# Altium PCB PCB1.PcbDoc (part 3 of 3)
Units mm, origin at the board's own origin, x right, y up, seen from the top; angles counter-clockwise.
Board outline 52.5 x 44.25 mm, 6 copper layers (Top Layer, Int1 (GND), Int2 (Sign), Int3 (Sign), Int4 (PWR), Bottom Layer), stack 1.551 mm thick; 69 components, 80 nets, 350 pads, 96 vias.
Unrouted connection lines stored in the file: 150.
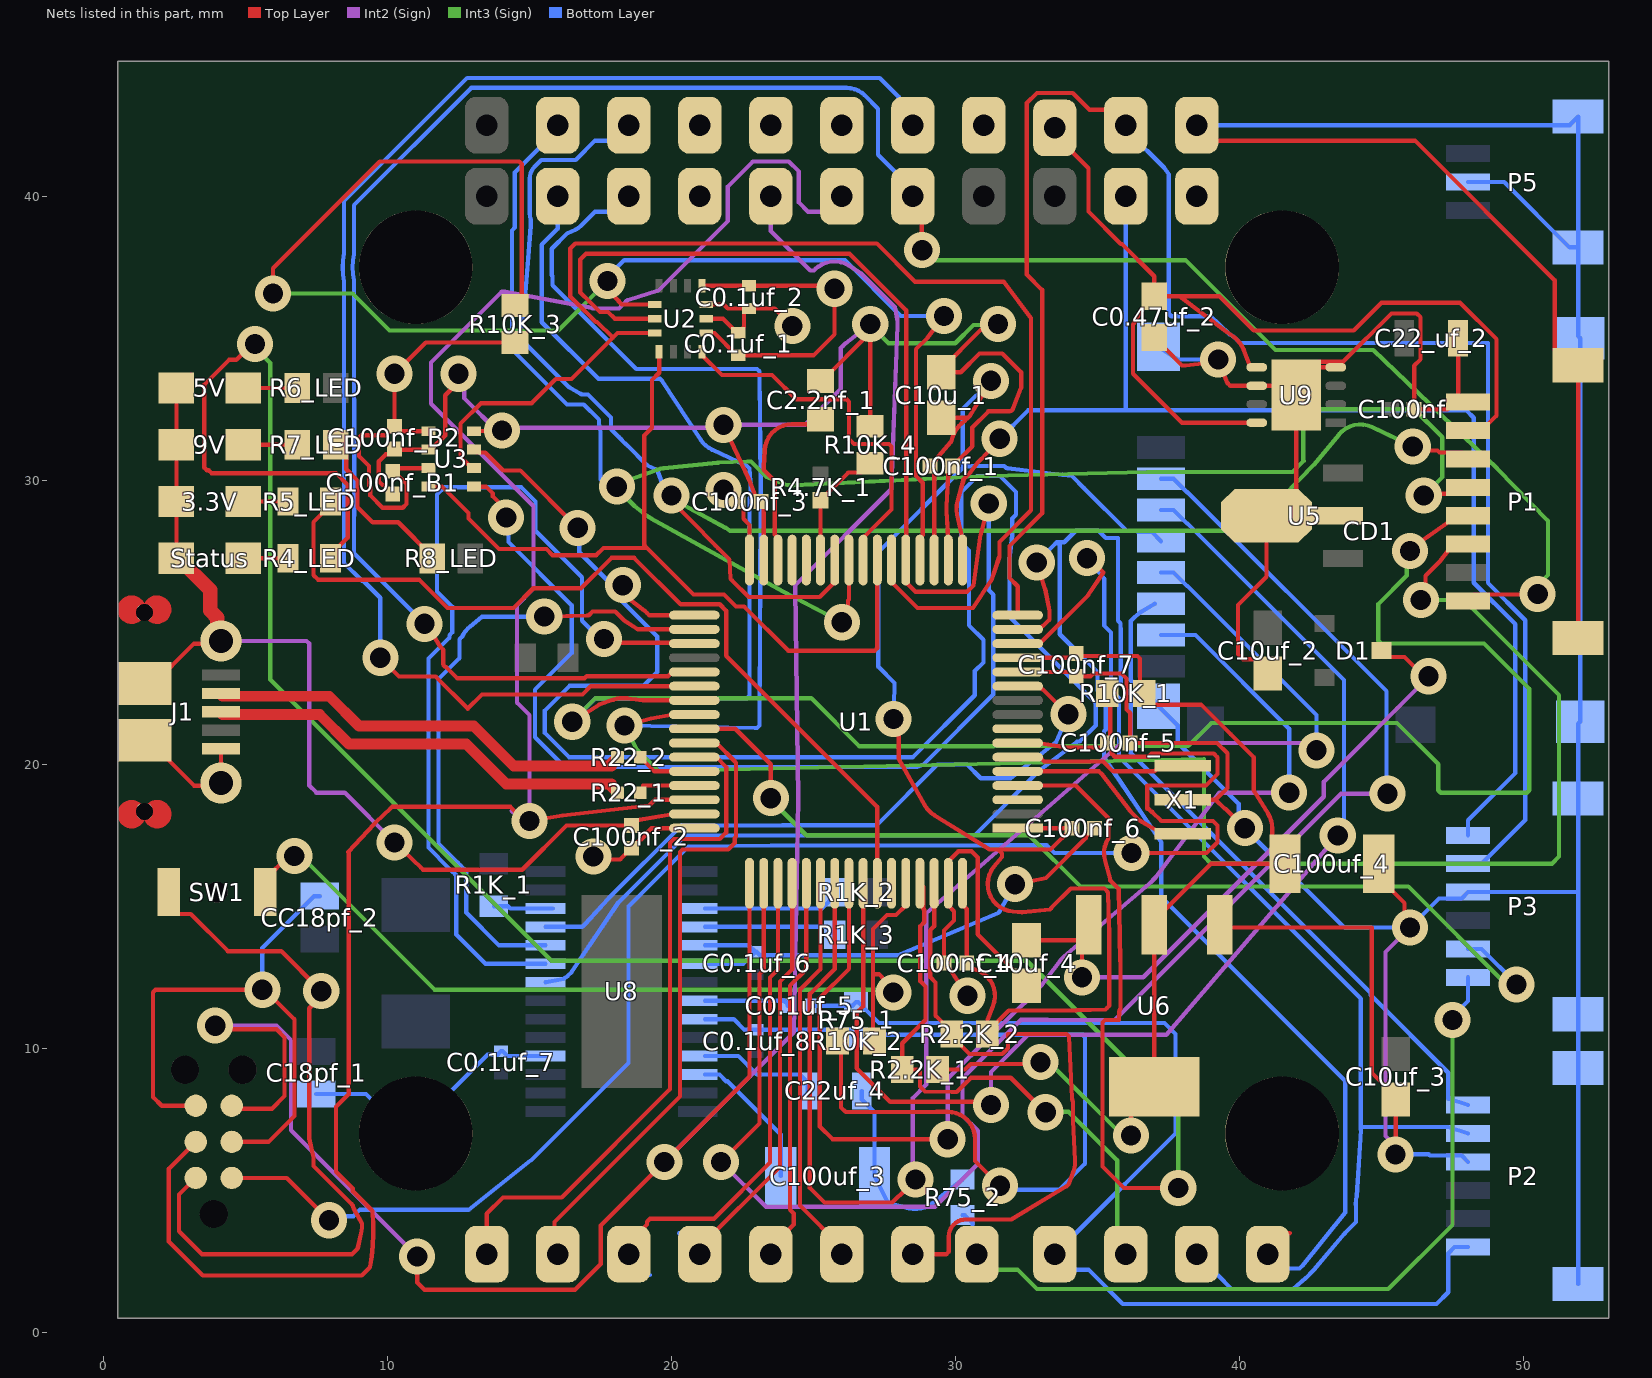
[diagram p6: the nets of this part, all layers, seen from the top]

## Via types
v1: diameter 1.27, hole 0.711, Top Layer to Bottom Layer, 96 vias

## Nets (pads, with @x,y where several pads share a name; then routed paths per layer and width w, separated by ;. In a path a pad name is that pad's centre, name@x,y a point inside that pad or via, vN(x,y) a via of type N, cw(c..) or ccw(c..) an arc to the next point about the centre after c; other vN are vias at no path point) (continued)
FLASH_CS: CD1.2 U1.50 | length 57.8
  Top Layer w0.15: v1(21.75,6) 23.1,7.35 23.1,12.616 23.25,12.766 U1.50@23.25,15.809
  Int2 (Sign) w0.15: v1(21.75,6) 23.33,4.42 29.277,4.42 30.787,5.93 30.787,7.1 30.252,7.635 30.252,8.947 32.311,11.006 33.248,11.006 33.254,11 35.608,11 43.573,18.964 v1(45.215,18.964)
  Bottom Layer w0.15: CD1.2@37.24,30.05 37.68,30.05 38.155,29.575 38.173,29.575 45.174,22.574 45.174,19.005 v1(45.215,18.964)
GND: 3.3V.1 5V.1 9V.1 C0.1uf_1.2 C0.1uf_2.2 C0.1uf_6.2 C0.1uf_7.2 C0.1uf_8.2 C0.47uf_2.2 C2.2nf_1.1 C10u_1.2 C10uf_2.2 C10uf_3.2 C10uf_4.2 C18pf_1.2 C22_uf_2.2 C100nf.2 C100nf_1.2 C100nf_2.2 C100nf_3.2 C100nf_4.2 C100nf_5.2 C100nf_6.2 C100nf_7.2 C100nf_B1.2 C100nf_B2.2 C100uf_4.2 CC18pf_2.2 CD1.6 CD1.11 CD1.12 CD1.13 CD1.14 J1.5 J1.6 J1.7 J1.8 J1.9 J1.10 J1.11 P1.8 P1.MP1 P1.MP2 P2.3 P2.MP1 P2.MP2 P3.3 P3.MP1 P3.MP2 P5.2 P5.MP1 P5.MP2 pad.5 pad.8 pad.11 pad.14 pad.44 pad.55 pad.56 pad.57 pad.59 pad.60 pad.63 pad.64 R10K_2.1 R10K_4.1 R75_1.1 Status.1 U1.12 U1.18 U1.31 U1.47 U1.63 U2.6 U2.7 U3.1 U3.7 U5.2 U6.1 U8.4 U8.19 U8.20 U8.23@20.93,11.025 U9.4 U9.6 U9.9 X1.2 | length 388.8
  Top Layer w0.15: J1.9@1.491,22.747 1.691,22.747 3.191,24.247 J1.6@4.191,24.247 ; J1.10@1.591,20.747 1.891,20.447 1.991,20.447 3.191,19.247 J1.7@4.144,19.247 ; Status.1@2.575,27.25 3.3V.1@2.575,29.25 9V.1@2.575,31.25 5V.1@2.575,33.25 2.605,33.25 5V.1@3.08,33.725 ; pad.64@3.251,7.976 2.055,7.976 1.75,8.28 1.75,11.974 1.838,12.062 v1(5.596,12.062) ; J1.7@4.144,19.344 J1.5@4.144,20.544 ; pad.63@4.521,6.706 5.817,6.706 6.731,7.62 6.731,11.019 v1@5.642,12.108 ; C100nf_B1.2@10.185,29.515 9.87,29.83 9.832,29.83 9.7,29.962 9.7,30.668 9.947,30.915 10.065,30.915 C100nf_B2.2@10.25,31.1 10.275,31.075 U3.7@11.45,31.075 11.525,31.075 11.775,31.325 11.793,31.325 12.039,31.571 12.039,32.994 12.5,33.455 v1(12.5,33.75) ; v1(10.25,17.25) 11.195,16.349 11.258,16.286 13.8,16.286 14.75,16.286 16.307,17.843 C100nf_2.2@18.592,17.843 18.777,18.028 20.071,18.25 U1.47@20.809,18.25 ; U3.1@13.05,31.725 13.062,31.737 14.024,31.737 v1(14.036,31.749) ; pad.14@21,42.5 pad.14@21,42.738 ; U2.6@21.233,35.687 21.813,35.687 22.302,35.198 C0.1uf_1.2@22.352,35.198 22.402,35.198 22.527,35.323 22.527,35.373 22.558,35.404 22.558,35.924 C0.1uf_2.2@22.683,36.049 ; U2.7@21.233,36.187 21.843,36.187 21.981,36.049 C0.1uf_2.2@22.683,36.049 ; v1(21.837,31.951) 22.71,30.067 cw(c21.835,29.662) 22.729,30.022 22.965,29.435 23.25,29.15 U1.31@23.25,27.191 ; v1(24.257,35.433) 23.641,36.049 C0.1uf_2.2@22.733,36.049 C0.1uf_2.2@22.683,36.049 ; C2.2nf_1.1@25.25,33.5 25.3,33.5 v1@27,35.2 ; R10K_2.1@25.85,10.25 25.974,10.126 25.974,7.917 26.137,7.754 29.32,7.754 29.33,7.764 29.729,7.764 cw(c29.729,6.8) 30.693,6.795 30.692,6.603 30.692,6.033 v1(31.564,5.162) ; v1@26.83,35.5 v1(27,35.5) v1@27,35.2 ; R10K_4.1@27,31.9 v1@27,35.2 ; U1.18@29.75,27.191 29.75,27.929 29.689,28.919 cw(c31,29) 29.688,29.071 29.75,30.226 29.75,30.35 C100nf_1.2@29.9,30.5 30.594,31.193 30.594,31.861 31.158,32.426 31.888,32.426 ; v1(30.427,11.851) 29.785,12.815 C100nf_4.2@29.6,13 29.6,14.15 29.95,14.5 29.95,14.827 29.75,15.027 U1.63@29.75,15.809 29.75,16.586 30.102,16.938 30.562,16.938 30.617,16.883 30.785,16.715 30.785,14.012 32.5,12.296 C10uf_4.2@32.5,12.198 ; v1(31.5,35.5) 31.286,35.286 30.886,35.286 29.5,33.9 C10u_1.2@29.5,33.802 30.189,33.802 30.851,34.464 31.649,34.464 32.313,33.8 32.313,33.254 32.028,32.521 cw(c31.888,32.576) 31.889,32.426 ; v1(32.099,15.777) 33.034,15.957 33.185,15.997 34.585,17.397 34.585,17.435 C100nf_6.2@34.9,17.75 ; U1.12@32.191,23.25 34.1,23.25 C100nf_7.2@34.25,23.1 34.757,23.1 34.857,23.2 35.843,23.2 36.025,23.018 36.025,21.932 36.157,21.8 36.157,20.757 C100nf_5.2@36.15,20.75 ; C100nf_5.2@36.269,20.75 39.213,20.75 39.575,20.388 39.575,19.163 39.162,18.75 ; C0.47uf_2.2@37,35.023 37,35 37.381,34.619 37.404,34.619 37.979,34.044 38.104,34.044 39.162,34.162 v1(39.25,34.25) 39.587,33.413 39.651,33.349 39.675,33.325 U9.6@40.61,33.325 41.675,33.325 U9.9@42,33 ; X1.2@38,18.75 39.162,18.75 ; pad.5@38.5,42.5 39.044,41.956 46.182,41.956 51.1,37.038 51.1,34.575 51.625,34.05 P1.MP2@51.925,34.05 P1.MP1@51.925,24.45 ; U6.1@39.3,14.35 39.3,13.875 39.537,14.112 39.675,14.25 44.662,14.25 44.662,9.134 45.5,8.296 C10uf_3.2@45.5,8.198 ; v1(40.189,17.75) 39.5,18.439 39.473,18.439 39.162,18.75 ; C10uf_2.2@41,23.198 41,23.269 40.569,23.7 40.126,23.7 39.95,23.876 39.95,25.605 40.95,26.605 U5.2@40.95,28.75 U5.2@41.125,28.75 ; U9.9@42.459,33.209 U9.9@42.613,33.363 ; U9.4@43.391,33.975 42.8,33.975 U9.9@42,33.175 ; U5.2@43.45,28.75 U5.2@41.125,28.75 ; C100uf_4.2@44.9,16.5 44.9,16.025 45.815,15.11 45.815,14.435 v1(46,14.25) ; v1(45.498,6.266) 45.498,8.196 C10uf_3.2@45.5,8.198 ; C10uf_3.2@45.75,7.948 C10uf_3.2@45.5,8.198 ; C22_uf_2.2@47.7,35 47.7,32.975 47.925,32.75 47.575,32.75 47.325,32.5 C100nf.2@46.15,32.5 46.15,34.032 46.375,34.257 46.375,35.743 46.243,35.875 45.357,35.875 43.657,34.175 42.8,34.175 42,33.375 U9.9@42,33.175 ; U5.2@41.125,28.75 42,29.625 U9.9@42,33 ; U9.9@42,33 U9.9@42,33.175
  Top Layer w0.5: Status.1@2.575,27.25 2.65,27.25 3.76,26.14 3.76,25.411 4.009,25.162 4.009,24.429 J1.6@4.191,24.247
  Int2 (Sign) w0.15: J1.6@4.144,24.344 7.156,24.344 7.25,24.25 7.25,19.25 7.499,19.001 8.499,19.001 v1(10.25,17.25) ; v1(12.5,33.75) 12.703,33.547 12.703,32.89 13.94,31.653 14.137,31.85 21.744,31.85 v1@21.844,31.75 ; v1(21.837,31.951) 21.837,31.757 v1@21.844,31.75 ; v1(27,35.5) 26.14,34.828 26.052,34.74 25.964,34.652 25.964,33.214 24.701,31.951 22.045,31.951 v1@21.844,31.75 ; v1(45.498,6.266) 45.498,6.555 45.14,6.914 45.14,13.39 v1(46,14.25)
  Int3 (Sign) w0.15: v1(27,35.5) 27,35.466 27.644,34.822 29.994,34.822 30.64,35.468 31.468,35.468 v1(31.5,35.5)
  Bottom Layer w0.15: v1@5.381,12.276 v1(5.596,12.062) 5.596,13.531 7.42,15.355 CC18pf_2.2@7.62,15.355 ; C18pf_1.2@7.493,8.394 9.247,8.394 10.641,7 pad.56@11,7 11,7.25 13.525,9.775 13.875,9.775 C0.1uf_7.2@14,9.9 14.05,9.9 14.225,9.725 U8.4@15.57,9.725 ; U8.23@21.18,11.025 22.199,11.025 22.574,10.65 C0.1uf_8.2@23,10.65 26.225,10.65 R75_1.1@26.5,10.375 26.6,10.475 34.477,10.475 34.565,10.387 34.565,5.939 33.642,5.016 31.71,5.016 v1(31.564,5.162) ; U8.20@21.18,12.975 22.525,12.975 C0.1uf_6.2@22.95,13.4 ; U8.19@21.18,13.625 22.725,13.625 C0.1uf_6.2@22.95,13.4 ; v1(32.099,15.777) 31.553,14.818 31.543,14.801 31.528,14.787 31.507,14.766 27.965,13.275 23.263,13.275 23.125,13.275 C0.1uf_6.2@23,13.4 C0.1uf_6.2@22.95,13.4 ; CD1.13@37,35.475 CD1.13@37.15,34.7 37.825,34.25 v1(39.25,34.25) ; CD1.6@37.02,25.65 36.475,25.325 36.307,25.175 36.175,25.043 36.175,22.957 36.307,22.825 36.475,22.765 CD1.14@37.15,22.09 ; CD1.14@37.15,22.04 37.825,21.365 37.825,20.757 39.975,18.607 39.975,17.964 v1(40.189,17.75) 43.689,14.25 v1(46,14.25) 47.025,15.275 47.825,15.275 P3.3@48.05,15.5 51.925,15.5 ; pad.5@38.5,42.857 pad.5@38.5,42.5 51.625,42.5 P5.MP1@51.925,42.8 P5.MP2@51.925,38.2 ; v1(45.498,6.266) 46.662,6.266 46.703,6.225 47.825,6.225 P2.3@48.05,6 ; P5.2@48.05,40.5 49.325,40.5 51.625,38.2 P5.MP2@51.925,38.2 ; P2.MP2@51.925,1.7 P2.MP1@51.925,9.3 P3.MP2@51.925,11.2 51.925,15.5 ; 51.925,15.5 P3.MP1@51.925,18.8 51.925,21.425 CD1.11@52,21.5 CD1.12@52,35 51.925,35.075 P5.MP2@51.925,38.2
GYRO_1_CS: R10K_3.2 U1.20 U2.12 | length 53.7
  Top Layer w0.15: v1(5.969,36.576) 5.969,37.465 9.729,41.225 14.644,41.225 14.732,41.137 14.732,36.382 R10K_3.2@14.5,36.15 ; v1(17.755,37.012) 17.755,36.708 18.147,36.317 18.147,36.293 18.253,36.187 U2.12@19.407,36.187 ; U1.20@28.75,27.191 28.75,27.973 28.85,28.073 28.85,29.912 28.615,30.147 28.615,34.615 29.029,35.029 v1(29.593,35.786)
  Int3 (Sign) w0.15: v1(5.969,36.576) 8.777,36.576 10.078,35.275 16.018,35.275 v1(17.755,37.012)
  Bottom Layer w0.15: v1(17.755,37.012) 17.755,37.166 18.339,37.75 26.113,37.75 28.077,35.786 v1(29.593,35.786)
GYRO_1_EXTI: U1.24 U2.4 | length 13.3
  Top Layer w0.15: U2.4@21.07,34.525 21.07,34.412 21.78,33.702 23.545,33.702 24.397,32.85 26.162,32.85 26.25,32.762 26.25,31.457 26.432,31.275 27.662,31.275 27.75,31.187 27.75,28.968 26.75,27.968 U1.24@26.75,27.191
I2C1_SCL_PIN: pad.41 R2.2K_1.1 U1.61 | length 20.2
  Top Layer w0.15: U1.61@28.75,15.809 28.75,15.69 28.869,15.69 28.869,14.913 28.9,14.882 28.9,14.44 28.765,14.305 28.765,12.36 28.95,12.175 28.95,11.005 28.125,10.18 R2.2K_1.1@28.125,9.25 28.662,9.25 28.75,9.162 28.75,8.655 28.907,8.498 28.928,8.477 29.876,8.464 ccw(c29.878,8.614) 29.878,8.464 30.046,8.464 30.546,8.964 31.947,8.964 33.163,7.749 v1(33.178,7.749)
  Int3 (Sign) w0.15: v1(33.178,7.749) 33.195,7.766 33.984,7.766 35.694,6.056 35.694,3.056 pad.41@36,2.75
I2C1_SDA_PIN: pad.37 R2.2K_2.1 U1.62 | length 22.8
  Top Layer w0.15: pad.37@28.5,2.75 29.675,2.75 29.719,2.794 29.763,2.838 29.763,3.369 cw(c30.369,3.369) 30.369,3.975 31.964,3.975 33.908,5.142 33.926,5.154 33.982,5.209 34.151,5.658 ccw(c33.25,6) 34.213,6.049 34.142,7.47 cw(c34.292,7.478) 34.142,7.478 34.142,8.087 ccw(c33.992,8.087) 34.134,8.135 34.112,8.201 cw(c34.254,8.249) 34.104,8.241 33.996,10.412 33.908,10.5 31.849,10.5 31.849,10 31.649,9.8 30.5,9.8 29.875,10.425 R2.2K_2.1@29.875,10.5 29.875,10.575 29.3,11.15 29.3,12.32 29.115,12.505 29.115,14.16 29.25,14.295 U1.62@29.25,15.809
LED0: R4_LED.2 U1.4 | length 86.1
  Top Layer w0.15: v1(5.334,34.798) 5.237,34.798 4.677,34.238 4.42,34.238 3.556,33.374 3.556,30.441 3.644,30.353 3.707,30.353 3.81,30.25 8.193,30.25 8.6,29.843 8.6,27.975 8,27.375 R4_LED.2@8,27.25 ; U1.4@32.191,19.25 34.238,19.25 35.39,18.098 35.39,17.975 35.385,17.397 ccw(c36.195,16.874) 35.263,16.627 35.454,15.909 35.469,15.894 35.75,15.613 35.802,13.1 ccw(c35.952,13.103) 35.803,13.082 35.812,13.02 cw(c35.664,12.999) 35.814,12.999 35.814,11.401 35.806,11.391 ccw(c35.921,11.295) 35.771,11.301 35.76,11 ; 35.76,11 35.263,11 35.175,10.912 35.175,5.842 35.937,5.08 v1(37.846,5.08)
  Int3 (Sign) w0.15: v1(5.334,34.798) 5.334,34.666 5.876,34.124 5.876,22.987 15.782,13.081 32.511,13.081 37.846,7.746 v1(37.846,5.08)
LED1: R5_LED.2 U1.58 | length 31.2
  Top Layer w0.15: R5_LED.2@8,29.25 8,29.125 7.4,28.525 7.4,26.657 7.557,26.5 11.119,26.5 12.119,25.5 14.438,25.5 15.136,26.198 16.819,26.198 17.889,27.268 18.688,27.268 20.325,25.631 21.705,25.631 21.928,25.408 21.928,23.822 27.25,18.5 U1.58@27.25,15.809
LED_STRIP: P3.5 U1.41 | length 35.6
  Top Layer w0.15: U1.41@20.809,21.25 22.25,21.25 23.5,20 23.5,18.808 v1(23.499,18.807)
  Int3 (Sign) w0.15: v1(23.499,18.807) 23.499,18.751 24.132,18.118 24.75,17.5 32.596,17.5 34.399,15.697 45.947,15.697 49.393,12.25 v1(49.75,12.25)
  Bottom Layer w0.15: P3.5@48.05,13.5 48.525,13.5 49.75,12.275 v1(49.75,12.25)
MAX7456_SPI_CS: U1.33 U3.2 U8.8 | length 79.1
  Top Layer w0.15: U3.2@13.05,31.075 13.15,30.975 13.446,30.975 14.077,30.344 14.681,30.344 v1(16.699,28.326) ; v1(18.288,26.304) 18.226,26.242 18.226,26.035 19.057,25.409 19.145,25.321 19.216,25.25 U1.33@20.809,25.25
  Bottom Layer w0.15: U8.8@15.57,12.325 16.195,12.44 16.363,12.56 16.495,12.692 18.138,15.136 20.495,17.493 23.992,17.493 23.994,17.495 30.667,17.495 32.966,19.795 34.243,20.759 34.283,20.798 34.374,20.798 34.938,21.362 34.938,22.161 31.904,25.195 31.904,25.307 31.9,27.098 cw(c32.864,27.099) 31.905,27.203 32.001,28.073 32.001,28.65 32.136,28.784 32.136,29.583 31.571,30.148 30.772,30.148 30.208,29.583 30.208,27.792 30.475,27.525 30.475,24.891 30.984,24.382 30.984,23.583 30.682,23.281 30.682,22.432 28.5,20.25 16.391,20.25 15.544,21.097 15.544,21.896 16.409,22.761 19.011,22.761 19.5,23.25 19.5,24.5 18.059,25.941 v1@18.059,26.035 ; v1(16.699,28.326) 16.755,28.271 16.755,27.466 18.059,26.162 v1@18.059,26.035 ; v1(18.288,26.304) 18.059,26.075 v1@18.059,26.035
MCU_BOOT0: R10K_2.2 SW1.1 U1.60 | length 32.2
  Top Layer w0.15: SW1.1@5.7,15.5 5.7,15.95 6.52,16.77 v1(6.723,16.77) ; R10K_2.2@27.15,10.25 27.1,10.3 27.1,12.61 ; v1(27.814,11.961) 27.4,12.522 27.312,12.61 27.1,12.61 ; U1.60@28.25,15.809 28.25,15.032 27.908,14.69 27.592,14.69 27.1,14.198 27.1,12.61
  Int3 (Sign) w0.15: v1(6.723,16.77) 6.954,16.77 11.658,12.065 27.71,12.065 v1(27.814,11.961)
MCU_CLOCK_IN: U1.5 X1.1 | length 6.7
  Top Layer w0.15: U1.5@32.191,19.75 35.058,19.75 35.145,19.662 36.15,18.355 36.181,18.324 36.486,18.019 37.075,17.675 37.081,17.674 37.105,17.65 37.26,17.65 X1.1@38,17.55
MCU_CLOCK_OUT: U1.6 X1.3 | length 6.1
  Top Layer w0.15: U1.6@32.191,20.25 32.968,20.25 33.118,20.1 35.203,20.1 35.552,19.75 37,19.75 37.2,19.95 X1.3@38,19.95
MCU_NRST: C100nf_5.1 pad.62 R10K_1.1 U1.7 | length 60.9
  Top Layer w0.15: pad.62@4.521,5.436 6.456,5.436 v1(7.946,3.946) ; U1.7@32.191,20.75 32.929,20.75 33.856,20.601 ccw(c34,21.5) 34.007,20.59 35.165,20.59 C100nf_5.1@35.35,20.75 ; R10K_1.1@35.35,22.5 35.45,22.4 35.45,20.75 C100nf_5.1@35.35,20.75 ; v1(36.195,16.874) 38.842,16.874 39.225,17.257 39.225,17.843 39.068,18 37.25,18 36.925,18.325 36.907,18.325 36.8,18.432 36.75,18.432 36.75,19.25 38.818,19.25 39.225,19.657 39.225,20.243 39.093,20.375 36.907,20.375 36.797,20.265 35.612,20.265 35.507,20.369 35.507,20.593 C100nf_5.1@35.35,20.75
  Bottom Layer w0.15: v1(7.946,3.946) 8.09,4.09 8.806,4.09 9.035,4.319 12.862,4.319 ; 12.863,4.319 15.045,6.049 ccw(c14.446,6.804) 15.128,6.123 18.488,9.485 18.488,14.991 20.604,17.107 23.508,17.143 cw(c23.51,16.993) 23.51,17.143 24.137,17.143 30.812,17.145 33.216,17.145 33.488,16.874 v1(36.195,16.874)
MCU_VCAP1: C2.2nf_1.2 U1.30 | length 6.6
  Top Layer w0.15: U1.30@23.75,27.191 23.75,27.973 23.635,28.088 23.635,29.984 23.247,30.372 23.247,30.434 23.247,30.454 23.254,30.482 23.284,31.061 cw(c24.247,31.01) 24.247,31.974 24.85,31.974 C2.2nf_1.2@25.25,32.15
Net3.3V_2: 3.3V.2 R5_LED.1 | length 1.6
  Top Layer w0.15: 3.3V.2@4.925,29.25 R5_LED.1@6.5,29.25
Net5V_2: 5V.2 R6_LED.1 | length 1.9
  Top Layer w0.15: 5V.2@4.925,33.25 R6_LED.1@6.825,33.25
Net9V_2: 9V.2 R7_LED.1 | length 1.9
  Top Layer w0.15: 9V.2@4.925,31.25 R7_LED.1@6.825,31.25
NetC0.1uf_5_2: C0.1uf_5.2 U8.22 | length 3
  Bottom Layer w0.15: U8.22@21.18,11.675 23.975,11.675 24.1,11.55 C0.1uf_5.2@24.1,11.5
NetC10uf_4_1: C10uf_4.1 D1.3 U6.3 | length 22.9
  Top Layer w0.15: C10uf_4.1@32.5,13.802 U6.3@34.5,13.802 ; v1(34.455,12.5) 34.455,13.757 U6.3@34.5,13.802 ; U6.3@34.7,14.35 34.5,14.15 U6.3@34.5,13.802 ; D1.3@45,24 45.225,23.775 45.813,23.775 46.49,23.098 v1(46.659,23.098)
  Int2 (Sign) w0.15: v1(34.455,12.5) 36.613,12.5 42.968,18.855 42.968,19.381 46.659,23.072 v1(46.659,23.098)
NetC22uf_4_1: C22uf_4.1 U8.25 | length 4.3
  Bottom Layer w0.15: U8.25@21.18,9.725 22.357,9.725 23.007,9.075 24.525,9.075 24.8,8.8 C22uf_4.1@24.8,8.5
NetC22uf_4_2: C22uf_4.2 C100uf_3.2 R75_2.2 | length 7.2
  Bottom Layer w0.15: C22uf_4.2@26.7,8.5 26.7,8.2 27.15,7.75 C100uf_3.2@27.15,5.5 27.625,4.55 28.354,4.367 ccw(c28.589,5.302) 29.181,4.541 29.9,5.1 R75_2.2@30.25,5.375
NetC100uf_3_1: C100uf_3.1 U8.26 | length 5
  Bottom Layer w0.15: U8.26@21.18,9.075 21.69,9.075 21.925,8.84 21.973,8.84 23.85,6.963 C100uf_3.1@23.85,5.5
NetR1K_1_2: R1K_1.2 U8.12 | length 2.1
  Bottom Layer w0.15: R1K_1.2@13.75,15 14.25,15 14.325,14.925 U8.12@15.82,14.925
NetR1K_2_2: R1K_2.2 U8.17 | length 4.9
  Bottom Layer w0.15: U8.17@21.18,14.925 25.3,14.925 25.75,15.375 R1K_2.2@25.75,15.5
NetR1K_3_2: R1K_3.2 U8.18 | length 4.7
  Bottom Layer w0.15: U8.18@21.18,14.275 25.475,14.275 R1K_3.2@25.75,14
NetR4_LED_1: R4_LED.1 Status.2 | length 1.6
  Top Layer w0.15: Status.2@4.925,27.25 R4_LED.1@6.5,27.25
NetR7_LED_2: R7_LED.2 R8_LED.1 | length 5.9
  Top Layer w0.15: R7_LED.2@8.175,31.25 8.55,30.875 8.55,30.388 8.95,29.988 8.95,29.05 9.481,28.519 10.381,28.519 11.575,27.325 R8_LED.1@11.575,27.25
PC14: U1.3
PINIO1_PIN: U1.8
S1: P1.6 pad.15 U1.26 | length 57.2
  Top Layer w0.15: v1(20.006,29.462) 20.004,29.462 19.911,29.369 21.536,27.714 21.623,27.627 22.045,27.205 22.08,26.529 22.121,26.488 22.723,25.885 25.221,25.885 25.75,26.414 U1.26@25.75,27.191 ; v1(46.102,31.19) 46.241,31.05 46.969,31.05 47.044,30.975 47.825,30.975 P1.6@48.05,30.75
  Int3 (Sign) w0.15: v1(20.006,29.462) 19.963,29.42 19.963,29.384 21.917,28.323 22.064,28.22 ; 22.065,28.22 39.846,28.22 39.849,28.22 40.401,28.245 40.486,28.33 42.609,30.533 43.508,31.616 cw(c44.25,31) 44.663,31.871 v1(46.102,31.19)
  Bottom Layer w0.15: pad.15@18.5,42.5 17.956,41.956 17.313,41.956 16.632,41.275 15.418,41.275 15.191,41.048 ccw(c15.619,40.619) 15.013,40.619 15.013,39.381 ccw(c15.619,39.381) 15.04,39.201 ccw(c15.619,39.381) 15.046,39.185 15.046,38.964 14.823,36.167 14.733,35.484 14.733,35.122 14.749,34.969 14.792,34.878 16.377,33.293 16.407,33.27 16.797,33.041 ccw(c16.873,33.171) 16.873,33.021 17.064,33.021 17.877,32.207 17.877,31.796 18.142,31.53 18.23,31.443 18.253,31.415 ccw(c18.987,32.041) 18.384,31.289 18.436,31.236 19.146,30.526 19.457,30.38 19.519,30.318 19.82,29.462 v1(20.006,29.462)
S2: P1.5 pad.16 U1.25 | length 62
  Top Layer w0.15: v1(26,25) 26.214,25.214 26.214,25.767 26.25,25.803 U1.25@26.25,27.191 ; v1(46.487,29.462) 46.55,29.525 47.825,29.525 P1.5@48.05,29.75
  Int3 (Sign) w0.15: v1(18.078,29.774) 18.201,29.897 19.489,30.368 cw(c19.82,29.462) 19.721,30.421 21.62,30.617 cw(c21.719,29.658) 21.684,30.621 22.681,30.66 22.805,30.66 23.347,30.117 23.875,29.897 ccw(c24.247,30.786) 24.291,29.823 31.126,30.147 cw(c31.172,29.184) 31.145,30.147 cw(c31.172,29.184) 31.148,30.147 36.751,30.288 41.87,30.288 42.259,30.678 42.25,30.687 42.25,32.412 42.338,32.5 46.155,32.5 47.143,31.511 47.143,30.118 v1(46.487,29.462) ; v1@18.198,29.6 18.712,29.086 19.162,28.736 ccw(c19.75,29.5) 19.284,28.656 23.931,26.087 v1(26,25)
  Bottom Layer w0.15: pad.16@16,42.5 16,42.352 14.487,40.839 14.487,38.9 14.383,38.796 14.383,34.609 16.321,32.671 16.914,32.671 17.451,32.133 17.451,31.984 cw(c16.505,31.677) 17.5,31.679 v1@17.5,30.03
S3: P1.4 pad.13 U1.39 | length 86
  Top Layer w0.15: v1(16.508,21.496) 17.454,22.1 17.957,22.275 cw(c18.273,21.364) 18.311,22.327 ccw(c18.317,22.477) 18.32,22.327 cw(c18.35,21.364) 18.579,22.3 ccw(c18.614,22.446) 18.596,22.297 ; 18.597,22.297 19.003,22.25 U1.39@20.809,22.25 ; v1(46.002,27.507) 46.007,27.507 46.25,27.75 47.35,28.525 P1.4@48.05,28.75
  Int3 (Sign) w0.15: v1(16.508,21.496) 16.508,21.508 17.328,22.328 24.921,22.328 26.617,20.631 31.344,20.631 31.354,20.641 38.196,20.641 39.01,21.454 45.551,21.454 47,20.005 47,19.088 47.088,19 50.12,19 50.208,19.088 50.208,22.656 48.613,24.25 48.05,24.25 47.553,24.25 45,24.25 44.89,24.36 44.89,25.647 45.89,26.647 45.89,27.396 v1(46.002,27.507)
  Bottom Layer w0.15: pad.13@16,40 16,38.858 15.436,38.294 15.436,35.564 17.429,33.571 19.595,33.571 19.683,33.483 21.031,31.424 ccw(c21.837,31.951) 21.431,31.077 22.662,30.504 22.75,30.416 22.797,29.728 cw(c21.835,29.662) 22.75,29.359 22.75,22.416 22.706,22.372 22.662,22.328 17.339,22.328 v1(16.508,21.496) v1@16.807,21.454
S4: P1.3 pad.43 U1.40 | length 85.2
  Top Layer w0.15: v1(18.35,21.364) 19.285,21.611 20.071,21.75 U1.40@20.809,21.75 ; v1(46.386,25.78) 46.547,25.94 46.547,26.64 47.05,27.143 47.35,27.525 P1.3@48.05,27.75
  Int3 (Sign) w0.15: v1(18.35,21.364) 18.8,20.494 19.487,19.807 19.531,19.763 19.593,19.763 ccw(c19.593,19.913) 19.596,19.763 38.751,20.187 38.751,16.749 39,16.5 51,16.5 51.25,16.75 51.25,22.433 47.903,25.78 v1(46.386,25.78)
  Bottom Layer w0.15: v1(18.35,21.364) 22.932,21.277 22.95,21.277 23.012,21.277 23.1,21.365 23.149,29.655 ccw(c21.835,29.662) 23.149,29.679 23.1,33.833 23.012,33.921 18.76,33.921 15.815,36.866 15.815,37.191 15.786,37.22 15.786,38.149 16.321,38.684 16.637,38.832 ccw(c16.381,39.381) 16.81,38.953 17.313,39.456 17.956,39.456 pad.43@18.5,40
S6: U1.59
S7: U1.28
S8: U1.29
SPI1_SCK: U1.21 U2.13 U3.4 | length 67.1
  Top Layer w0.15: U3.4@13.05,29.775 13.475,29.775 13.714,29.536 13.714,29.43 14.183,28.96 v1(14.183,28.683) ; U2.13@19.407,35.687 18.009,35.687 17.771,35.925 17.483,35.925 17.133,36.275 17.128,36.275 16.791,36.612 16.791,37.772 16.995,37.976 26.274,37.976 28.265,35.985 28.265,27.701 28.25,27.686 U1.21@28.25,27.191 28.25,26.414 28.592,26.072 30.408,26.072 30.631,26.295 30.867,27.976 30.879,28.066 30.936,28.249 v1(31.172,29.184)
  Bottom Layer w0.15: v1(14.183,28.683) 14.262,28.605 14.262,27.823 16.488,25.597 16.488,23.922 15.194,22.627 15.194,20.952 16.246,19.9 28.645,19.9 28.87,19.994 31.334,22.458 31.334,25.971 31.172,26.133 v1(31.172,29.184)
SPI1_SDI: U1.22 U2.14 U3.3 | length 46.2
  Top Layer w0.15: U3.3@13.05,30.425 12.975,30.425 12.725,30.675 12.707,30.675 12.575,30.807 12.575,31.993 13.295,32.713 15.08,32.713 15.929,33.562 16.481,33.562 17.939,35.02 ; U2.14@19.407,35.187 18.105,35.187 17.939,35.02 ; U1.22@27.75,27.191 27.75,26.414 28.664,25.5 30.616,25.5 31.263,26.483 31.542,27.295 ccw(c31.4,27.344) 31.55,27.344 31.55,27.829 32.663,28.943 32.663,35.691 31.703,36.99 28.576,36.99 27.233,38.332 16.615,38.332 16.441,38.158 16.441,36.467 16.983,35.925 16.988,35.925 17.338,35.575 17.384,35.575 17.939,35.02
SPI1_SDO: U1.23 U2.1 U3.5 | length 28.8
  Top Layer w0.15: U3.5@11.45,29.775 11.925,29.775 12.855,28.845 12.855,28.649 13.926,27.578 15.599,27.578 15.815,27.362 17.349,27.362 17.606,27.618 19.14,27.618 ; U2.1@19.57,34.525 19.57,33.782 19.316,33.528 19.316,31.85 19.042,31.575 19.042,27.717 19.14,27.618 ; U1.23@27.25,27.191 27.25,24.088 27.162,24 24.114,24 22.561,25.553 22.278,25.553 21.85,25.981 20.777,25.981 19.14,27.618
SPI2_SCK: U1.34 U8.10 | length 22.5
  Top Layer w0.15: v1(15.524,25.198) 17.02,25.234 ccw(c17.017,25.384) 17.123,25.278 17.223,25.378 18.022,25.378 18.32,25.079 ; 18.321,25.078 ccw(c18.426,25.185) 18.344,25.06 18.818,24.75 U1.34@20.809,24.75
  Bottom Layer w0.15: v1(15.524,25.198) 13.334,25.198 12.908,24.849 ccw(c13.517,24.102) 12.679,24.579 12.631,24.494 12.536,24.399 12.536,24.337 12.536,23.736 11.8,23 11.8,17.211 12.406,16.589 12.44,16.555 12.458,16.555 12.559,16.455 12.56,16.453 cw(c12.313,16.205) 12.561,16.452 12.562,16.451 12.775,16.238 12.775,14.782 13.932,13.625 U8.10@15.57,13.625
SPI2_SDI: U1.35 U8.9 | length 33
  Top Layer w0.15: v1(17.622,24.414) 17.755,24.281 20.778,24.281 U1.35@20.809,24.25
  Bottom Layer w0.15: U8.9@15.57,12.975 13.457,12.975 12.425,14.007 12.425,16.093 12.313,16.205 cw(c13,17.14) 12.169,16.33 11.45,17.068 11.45,23.723 12.186,24.459 12.186,24.544 12.281,24.639 12.281,25.552 11.75,26.083 11.75,29.5 12,29.75 14.716,29.75 15.213,29.253 15.213,28.224 16.851,26.587 16.851,25.055 17.492,24.414 v1(17.622,24.414)
SPI2_SDO: U1.11 U8.11 | length 24.3
  Top Layer w0.15: U1.11@32.191,22.75 32.929,22.75 33.087,22.631 33.956,21.762 v1(33.974,21.762)
  Bottom Layer w0.15: U8.11@15.57,14.275 16.861,14.275 16.949,14.363 17.788,15.281 20.357,17.85 20.364,17.843 23.898,17.843 23.905,17.85 27.221,17.85 29.359,19.988 30.412,19.988 30.89,19.51 31.937,19.51 33.512,20.753 33.528,20.769 33.549,20.793 v1(33.974,21.762)
SPI3_SCK: CD1.5 U1.55 | length 49.9
  Top Layer w0.15: U1.55@25.75,15.809 25.75,12.791 24.875,11.916 24.875,5.084 25.389,4.57 27.774,4.57 27.896,4.691 27.904,4.699 28.589,5.336 v1(28.589,5.384)
  Int2 (Sign) w0.15: v1(28.589,5.384) 28.5,5.473 28.5,8.25 28.972,8.722 28.972,14.757 35.85,20.75 35.906,20.75 41.628,20.75 42.563,20.762 42.714,20.611 v1(42.714,20.49)
  Bottom Layer w0.15: CD1.5@37.24,26.75 37.68,26.75 38.155,26.275 38.173,26.275 42.714,21.734 v1(42.714,20.49)
SPI3_SDI: CD1.7 U1.56 | length 40.3
  Top Layer w0.15: U1.56@26.25,15.809 26.25,12.796 25.225,11.771 25.225,7.25 25.675,6.8 29.723,6.8 v1(29.726,6.797)
  Int2 (Sign) w0.15: v1(29.726,6.797) 29.726,8.926 30.536,9.737 30.872,10.081 cw(c32.022,8.959) 30.903,10.112 31.529,10.719 ccw(c31.425,10.827) 31.531,10.721 32.131,11.321 cw(c32.237,11.215) 32.15,11.337 32.203,11.375 ccw(c32.116,11.497) 32.22,11.39 32.606,11.764 ccw(c28.638,15.855) 33.056,12.254 33.689,13.084 cw(c34.455,12.5) 33.829,13.233 36.814,15.786 ccw(c36.25,16.5) 36.946,15.914 ccw(c36.25,16.5) 36.96,15.931 36.966,15.937 37.053,16.024 39.245,18.953 39.292,19 v1(41.75,19)
  Bottom Layer w0.15: CD1.7@37.24,24.55 38.45,24.55 41.75,21.25 v1(41.75,19)
SPI3_SDO: CD1.3 U1.57 | length 43.5
  Top Layer w0.15: U1.57@26.75,15.809 26.75,11.475 26.525,11.25 26.525,9.293 27.704,8.114 31.136,8.114 v1(31.25,8)
  Int2 (Sign) w0.15: v1(31.25,8) 31.25,9.167 32.558,10.475 37.422,10.475 v1@43.458,17.492 ; v1@43.458,17.492 v1(43.461,17.489)
  Bottom Layer w0.15: CD1.3@37.24,28.95 37.68,28.95 38.155,28.475 38.173,28.475 43.678,22.97 43.678,18.009 43.461,17.793 v1(43.461,17.489)
SWCLK: pad.46 pad.65 U1.49 | length 82.8
  Top Layer w0.15: v1(3.937,10.795) 4.064,10.668 6.096,10.668 6.381,10.383 6.381,8.321 5.934,7.874 4.623,7.874 pad.65@4.521,7.976 ; v1(11.049,2.667) 11.049,1.754 11.303,1.5 16.607,1.5 17.513,2.406 17.513,3.763 v1(19.75,6) 22.75,9 U1.49@22.75,15.809
  Int2 (Sign) w0.15: v1(3.937,10.795) 6.096,10.795 6.604,10.287 6.604,7.112 v1(11.049,2.667) ; v1(19.75,6) 24.316,10.566 24.463,18.79 ccw(c23.499,18.807) 24.463,18.82 24.36,26.181 24.36,26.305 24.404,26.349 27.74,29.685 27.963,35.463 ccw(c27,35.5) 27.949,35.668 27.874,36.096 27.832,36.139 26.695,37.272 26.26,37.552 ; pad.46@23.5,40 23.5,38.775 24.848,37.427 24.892,37.383 25.016,37.383 25.056,37.423 cw(c25.738,36.741) 26.26,37.552
SWDIO: pad.48 pad.66 U1.46 | length 78.9
  Top Layer w0.15: pad.66@3.251,6.706 2.3,5.754 2.3,3.2 3.5,2 9.098,2 9.39,2.292 ccw(c2.082,3.587) 9.477,4.224 ccw(c2.082,3.587) 9.472,4.278 8.785,4.965 8.785,5.062 8.193,5.653 8.193,7.939 8.636,8.382 8.636,16.889 8.618,16.907 9.543,17.905 cw(c10.25,17.25) 9.585,17.948 10.121,18.459 10.165,18.5 14.337,18.5 14.837,18 v1(15,18) 16.162,18.193 19.218,18.55 19.418,18.75 U1.46@20.809,18.75
  Int2 (Sign) w0.15: 14.371,18.366 14.413,18.324 v1(15,18) 15,21.73 14.56,22.17 14.56,25.597 15.147,26.184 15.147,29.083 11.536,32.694 11.536,34.149 13.982,36.596 14.026,36.64 14.15,36.64 17.175,36.072 ; 17.176,36.072 cw(c17.147,35.924) 17.233,36.048 18.154,36.048 18.414,36.307 cw(c18.52,36.201) 18.474,36.344 19.54,36.683 21.987,39.13 21.987,40.344 22.868,41.225 24.132,41.225 24.487,40.87 24.487,39.782 24.813,39.456 25.456,39.456 pad.48@26,40
UART1_RX: pad.36 U1.43 | length 24.1
  Top Layer w0.15: pad.36@13.5,2.75 13.5,4.179 14.071,4.75 16.138,4.75 19.95,8.562 19.95,17.231 20.088,17.369 21.705,17.369 21.928,17.592 21.928,19.908 21.586,20.25 U1.43@20.809,20.25
UART1_TX: pad.31 U1.42 | length 22.9
  Top Layer w0.15: pad.31@16,2.75 15.588,3.162 15.887,3.461 15.887,3.887 20.3,8.3 20.3,16.912 20.388,17 22,17 22.228,17.228 22.228,17.397 22.278,17.447 22.278,20.053 22.228,20.103 22.228,20.108 21.586,20.75 U1.42@20.809,20.75
UART2_RX: P3.1 pad.54 U1.17 | length 45.6
  Top Layer w0.15: U1.17@30.25,27.191 30.25,27.929 30.059,28.792 cw(c31,29) 30.073,29.263 30.294,30.044 30.525,30.275 30.545,30.303 30.784,30.628 30.836,30.68 30.903,30.738 30.95,30.786 31.529,31.433 v1(31.558,31.462)
  Bottom Layer w0.15: v1(31.558,31.462) 32.556,32.46 35.96,32.46 ; pad.54@36,40 36,32.5 35.96,32.46 ; P3.1@48.05,17.5 48.05,18.031 49.714,19.694 49.714,24.928 48.25,26.392 48.25,32.2 47.99,32.46 35.96,32.46
UART2_TX: P3.2 pad.6 U1.16 | length 61.8
  Top Layer w0.15: U1.16@32.191,25.25 32.191,26.266 31.9,26.557 31.9,27.684 33.053,28.838 33.053,36.703 32.513,37.243 32.513,43.278 32.868,43.633 34.132,43.633 34.721,43.044 35.456,43.044 pad.6@36,42.5
  Bottom Layer w0.15: pad.6@36,42.5 36.381,41.881 36.752,41.6 37.35,41.002 37.513,40.768 37.513,35.863 37.601,35.775 38.975,35.775 39.623,35.163 cw(c39,34.5) 39.65,35.137 39.761,35.068 ; 39.761,35.067 cw(c39.25,34.25) 40.005,34.849 ; 40.027,34.833 48.75,34.833 48.75,26.387 50.064,25.073 50.064,18.039 48.525,16.5 P3.2@48.05,16.5
UART3_RX: pad.33 U1.52 | length 15.5
  Top Layer w0.15: pad.33@21,2.75 21,3 23.825,5.825 23.825,12.351 24.25,12.776 U1.52@24.25,15.809
  Bottom Layer w0.15: pad.33@20.264,3.486 20.336,3.486 21,2.822 pad.33@21,2.75
UART3_TX: pad.34 U1.51 | length 17.6
  Top Layer w0.15: pad.34@18.5,2.75 18.5,3.154 19.144,3.798 19.144,3.894 19.25,4 21.5,4 23.475,5.975 23.475,12.496 23.75,12.771 U1.51@23.75,15.809
  Bottom Layer w0.15: pad.34@18.5,2.75 18.5,2.678 19.164,2.014 pad.34@19.236,2.014
UART4_RX: P2.1 pad.32 U1.15 | length 64.7
  Top Layer w0.15: U1.15@32.191,24.75 32.929,24.75 33.087,24.869 33.31,25.092 33.31,25.405 33.16,26.166 v1(32.864,27.099) ; pad.32@41,2.75 41,2.822 41.664,3.486 41.761,3.486 41.775,3.5
  Bottom Layer w0.15: v1(32.864,27.099) 33.518,27.768 33.565,27.815 33.585,27.815 ; 37.25,17.25 37.25,15.32 43.728,8.842 43.728,4.217 42.205,2.338 42.117,2.25 41.5,2.25 pad.32@41,2.75 ; 37.251,17.25 35.23,20.236 35.23,21.159 35.288,21.218 35.288,22.306 35,22.594 35,23.25 33.673,24.577 33.673,27.727 33.585,27.815 ; P2.1@48.05,8 47.35,8.225 47.35,9.142 44.661,11.83 44.625,11.867 44.625,11.889 44.625,11.951 36.175,20.401 36.175,22.462 35.825,22.812 35.825,24.788 35.811,24.802 35.811,24.965 35.722,25.054 35.722,27.966 35.29,27.966 35.036,28.22 34.238,28.22 33.833,27.815 33.585,27.815
UART4_TX: P2.2 pad.42 U1.14 | length 43.7
  Top Layer w0.15: U1.14@32.191,24.25 32.968,24.25 34.681,25.962 35.211,26.754 34.71,27.256 v1(34.637,27.256) ; pad.42@38.5,2.75 pad.42@38.5,2.988
  Bottom Layer w0.15: v1(34.637,27.256) 35.235,26.531 35.235,24.883 35.475,24.643 35.475,22.614 35.759,22.33 35.759,20.259 44.275,11.744 44.275,7.25 ; pad.42@38.5,2.75 38.5,2.678 39.164,2.014 39.236,2.014 39.725,1.525 41.887,1.525 42.324,1.9 42.617,2.193 43.699,3.473 ccw(c43.585,3.569) 43.702,3.476 43.725,3.505 cw(c43.843,3.412) 43.737,3.518 44.103,3.884 44.103,4.404 ; 44.103,4.572 44.103,4.404 ; P2.2@48.05,7 47.35,7.225 45.502,7.23 ccw(c45.5,6.266) 45.496,7.23 44.487,7.225 44.3,7.225 44.275,7.25 ; 44.103,4.404 cw(c45.058,4.534) 44.126,4.78 44.275,7.133 44.275,7.25
UART5_RX: pad.35 U1.54 | length 14
  Top Layer w0.15: U1.54@25.25,15.809 25.25,12.786 24.525,12.061 24.525,4.463 26,2.988 pad.35@26,2.75
UART5_TX: pad.40 U1.53 | length 13.7
  Top Layer w0.15: pad.40@23.5,2.75 23.5,2.988 24.31,3.798 24.31,4.184 24.175,4.318 24.175,12.206 24.75,12.781 U1.53@24.75,15.809
UART6_RX: P1.1 pad.50 U1.37 | length 83.3
  Top Layer w0.15: v1(11.31,24.946) 11.35,24.906 11.388,24.906 11.849,24.151 11.902,24.098 11.964,24.036 11.964,23.558 11.964,23.529 11.975,23.502 ccw(c12.114,23.558) 12.076,23.413 12.464,23.025 16.94,23.025 17.015,23.1 19.877,23.1 20.027,23.25 U1.37@20.809,23.25 ; pad.50@28.5,40 28.817,39.683 28.817,38.112 v1(28.829,38.1) ; P1.1@48.05,25.75 48.275,25.975 50.475,25.975 v1(50.5,26)
  Int3 (Sign) w0.15: v1@29.261,37.75 38.103,37.75 41.268,34.586 44.71,34.586 49.085,30.404 49.088,30.401 50.86,28.571 50.86,26.663 50.5,26.303 v1(50.5,26)
  Bottom Layer w0.15: 8.825,28.75 8.825,27.431 v1(11.31,24.946) ; 8.836,28.75 8.825,37.031 cw(c11,37.5) 8.825,37.969 8.825,39.686 12.954,43.815 26.165,43.815 cw(c26.165,42.905) 26.811,43.545 27.276,43.081 27.276,41.462 28.5,40.238 pad.50@28.5,40
UART6_TX: pad.9 U1.38 | length 51.2
  Top Layer w0.15: v1(9.75,23.75) 10.41,23.09 11.698,23.09 12.83,21.958 13.332,22.46 16.871,22.46 17.16,22.75 U1.38@20.44,22.75
  Bottom Layer w0.15: v1(9.75,23.75) 9.75,25.863 9.149,26.464 9.103,26.464 8.475,27.092 8.475,36.995 cw(c11,37.5) 8.472,37.992 ccw(c8.325,38.02) 8.475,38.02 8.475,39.831 12.809,44.165 27.335,44.165 28.002,43.498 28.002,42.998 pad.9@28.5,42.5
USB_DATA2_N: J1.2 R22_2.1 | length 15.1
  Top Layer w0.381: J1.2@4.191,22.397 7.956,22.397 9.002,21.351 13.043,21.351 14.451,19.943 14.609,19.943 17.893,19.943 17.893,20.042 R22_2.1@18.1,20.25
USB_DATA2_P: J1.3 R22_1.1 | length 15.1
  Top Layer w0.381: J1.3@4.191,21.747 7.617,21.747 8.649,20.716 12.78,20.716 14.188,19.308 17.893,19.308 17.893,19.208 R22_1.1@18.1,19
USB_DATA_N: R22_2.2 U1.44 | length 2.1
  Top Layer w0.15: R22_2.2@18.9,20.25 19.4,19.75 U1.44@20.809,19.75
USB_DATA_P: R22_1.2 U1.45 | length 2.1
  Top Layer w0.15: R22_1.2@18.9,19 19,19.1 19,19.25 U1.45@20.809,19.25
USB_DETECT: R4.7K_1.2 R10K_4.2 U1.27 | length 4.4
  Top Layer w0.15: U1.27@25.25,27.191 R4.7K_1.2@25.25,29.298 25.252,29.298 26.229,30.275 26.675,30.275 R10K_4.2@27,30.6
VBAT_PAD: C0.47uf_2.1 P1.7 pad.7 U9.5 U9.8 | length 36.7
  Top Layer w0.15: pad.7@33.5,42.408 33.5,42.17 34.683,40.987 34.683,39.46 35.822,38.321 35.861,38.321 37,37.181 C0.47uf_2.1@37,36.477 ; 40.147,34.604 40.395,33.975 U9.5@40.61,33.975 ; 40.147,34.604 ccw(c39.25,34.25) 39.819,35.028 39.548,35.227 37.894,36.477 ; U9.8@40.61,32.025 37.975,32.025 36.25,33.75 36.25,34.25 36.25,35.433 36.25,35.472 36.269,35.506 36.319,35.596 36.619,36.072 C0.47uf_2.1@37,36.477 ; P1.7@48.05,31.75 48.525,31.75 49.05,32.275 49.05,34.968 47.768,36.25 44.998,36.25 44.023,35.275 40.502,35.275 39.3,36.477 37.894,36.477 ; C0.47uf_2.1@37,36.477 37.894,36.477
VDD: C0.1uf_1.1 C0.1uf_2.1 C10u_1.1 C100nf_1.1 C100nf_2.1 C100nf_3.1 C100nf_4.1 C100nf_6.1 C100nf_7.1 C100nf_B1.1 C100nf_B2.1 C100uf_4.1 CD1.4 pad.10 pad.61 R2.2K_1.2 R2.2K_2.2 R10K_1.2 R10K_3.1 SW1.2 U1.1 U1.13 U1.19 U1.32 U1.48 U1.64 U2.5 U2.8 U3.6 U3.8 U6.2 U6.4 | length 159.3
  Top Layer w0.15: SW1.2@2.3,15.5 2.3,15.05 2.625,14.725 3.078,14.725 4.383,13.42 6.263,13.42 v1(7.672,12.011) 7.762,11.921 7.25,11.408 7.25,6.822 7.397,6.154 cw(c7.25,6.122) 7.4,6.122 7.4,5.855 8.629,4.626 8.749,4.506 cw(c8.643,4.4) 8.787,4.443 8.8,4.4 ccw(c8.944,4.443) 8.811,4.372 9.106,3.828 cw(c8.25,3.75) 9.09,3.565 8.956,2.956 8.75,2.75 3.473,2.75 2.667,3.556 2.667,4.851 pad.61@3.251,5.436 ; U3.6@11.45,30.425 10.295,30.425 C100nf_B1.1@10.185,30.315 10.37,30.13 10.408,30.13 10.67,29.868 10.67,29.162 10.538,29.03 9.832,29.03 9.4,29.462 9.4,29.767 9.35,29.817 9.35,30.499 9,30.849 9,31.497 9.088,31.585 9.935,31.585 C100nf_B2.1@10.25,31.9 ; U3.8@11.45,31.725 10.425,31.725 C100nf_B2.1@10.25,31.9 ; R10K_3.1@14.5,34.85 11.35,34.85 v1(10.25,33.75) C100nf_B2.1@10.25,31.9 ; v1(17.25,16.75) 17.354,16.646 18.195,16.646 18.907,17.358 18.946,17.358 19.077,17.489 19.077,17.528 19.3,17.75 U1.48@20.809,17.75 ; U2.8@21.07,36.849 C0.1uf_2.1@22.733,36.849 ; U2.5@21.091,35.187 21.513,35.187 22.302,34.398 C0.1uf_1.1@22.402,34.398 ; v1(21.835,29.662) 22.165,29.435 22.535,29.065 22.535,28.642 22.75,28.427 U1.32@22.75,27.191 ; C0.1uf_1.1@22.352,34.398 25,34.398 25.738,35.136 v1(25.738,36.741) ; C0.1uf_2.1@22.733,36.849 25.635,36.849 v1@25.74,36.744 ; v1(27.818,21.596) 27.954,21.596 v1@28,21.642 ; v1@28.214,21.536 28,21.75 v1@28,21.642 ; U1.19@29.25,27.191 29.25,30.35 C100nf_1.1@29.1,30.5 29.285,30.685 29.415,30.853 29.831,31.342 29.857,31.383 cw(c31.082,31.088) 30.14,31.925 30.237,32.022 30.324,32.086 30.436,32.198 ; R2.2K_1.2@29.375,9.25 30.337,9.25 30.537,9.45 32.939,9.45 v1(33,9.511) ; C10u_1.1@29.5,32.198 30.436,32.198 ; U1.64@30.25,15.809 30.25,15.052 30.4,14.902 C100nf_4.1@30.4,13 30.585,12.815 30.735,12.764 cw(c30.427,11.851) 31.322,11.494 31.125,10.999 31.125,10.9 R2.2K_2.2@31.125,10.5 ; 30.523,32.285 30.436,32.198 ; 30.523,32.286 v1(31.25,33.5) ; R2.2K_2.2@31.125,10.575 31.875,11.325 34.256,11.34 ccw(c34.25,12.25) 34.276,11.34 35.287,11.369 35.331,11.413 35.419,11.501 35.419,14.012 35.375,15.493 35.243,15.625 34.061,15.625 33.37,14.934 33.326,14.89 32.347,14.791 32.023,14.816 cw(c32.099,15.777) 31.356,16.391 31.64,16.736 31.64,16.86 31.5,17 ; U1.1@31.453,17.75 U1.1@32.191,17.75 C100nf_6.1@33.95,17.75 ; U1.13@32.191,23.75 34.1,23.75 C100nf_7.1@34.25,23.9 34.335,23.815 36.412,23.815 36.5,23.727 36.5,22.65 R10K_1.2@36.65,22.5 36.65,22.425 36.975,22.1 38.65,22.1 39.697,21.053 40.5,20.25 40.5,19.126 40.5,19.084 40.522,19.048 41.01,18.255 ; C100nf_6.1@34.1,17.75 33.35,17 31.5,17 ; v1(36.182,6.932) 36.182,7.832 U6.4@37,8.65 U6.2@37,14.35 ; U6.2@37,14.5 39,16.5 C100uf_4.1@41.6,16.5 41.153,17.45 41.153,17.75 ccw(c40.189,17.75) 41.01,18.255 ; v1@28,21.642 28,20.203 28.923,18.553 ccw(c29.764,19.024) 29.259,18.203 31.214,17 31.5,17
  Int3 (Sign) w0.15: v1(33,9.511) 33.3,9.511 35.879,6.932 v1(36.182,6.932)
  Bottom Layer w0.15: v1(27.818,21.596) 27.854,22.741 27.854,22.865 27.286,23.433 27.286,27.41 27.286,27.472 30.274,30.46 30.304,30.49 ; v1(31.25,33.5) 30.253,32.503 30.253,30.481 cw(c30.82,27.277) 30.304,30.49 ; 31.746,30.468 31.716,30.498 30.627,30.498 30.619,30.49 30.304,30.49 ; 31.746,30.467 ccw(c31.852,30.574) 31.833,30.425 33.766,30.189 33.79,30.186 34.102,30.148 34.138,30.111 34.535,29.715 36.041,28.209 36.387,28.209 36.421,28.175 36.915,28.175 CD1.4@37.24,27.85
VideoIn: C0.1uf_5.1 P2.6 pad.39 R75_1.2 | length 39.8
  Bottom Layer w0.15: C0.1uf_5.1@24.9,11.5 26.375,11.5 R75_1.2@26.5,11.625 26.575,11.625 27.313,10.887 37.363,10.887 37.75,10.5 37.75,7 34.236,3.486 34.164,3.486 33.5,2.822 pad.39@33.5,2.75 34.044,2.206 34.687,2.206 35.893,1 46.937,1 47.35,1.413 47.35,2.775 47.575,3 P2.6@48.05,3
VideoOut: P3.6 pad.38 R75_2.1 | length 28.8
  Int3 (Sign) w0.15: pad.38@30.75,2.75 31.294,2.206 32.187,2.206 32.868,1.525 45.241,1.525 47.5,3.784 v1(47.5,11)
  Bottom Layer w0.15: R75_2.1@30.25,4.125 30.325,4.125 30.6,3.85 30.6,2.9 pad.38@30.75,2.75 ; v1(47.5,11) 47.5,11.116 48.05,11.666 P3.6@48.05,12.5
pads on no net: CD1.1 CD1.8 CD1.9 CD1.10 J1.4 SW1. U2.2 U2.3 U2.9 U2.10 U2.11 U8.1 U8.2 U8.13 U8.14 U8.15 U8.16 U8.23@18.25,12 U8.27 U8.28 U9.2 U9.7

## Polygon pours and split planes (outlines as drawn)
GND on Int1 (GND) (split plane): 52.49,1.01 1.01,1.01 1.01,44.24 52.49,44.24
VDD on Int4 (PWR) (split plane): 52.49,1.01 1.01,1.01 1.01,44.24 52.49,44.24

## Text inside footprints (layer, text, board x,y; h text height)
J1: Mechanical 1 "PCB EDGE" at -0.106,29.044 h0.3 r270